# EAGLE board M248X (EAGLE 6.6.0)
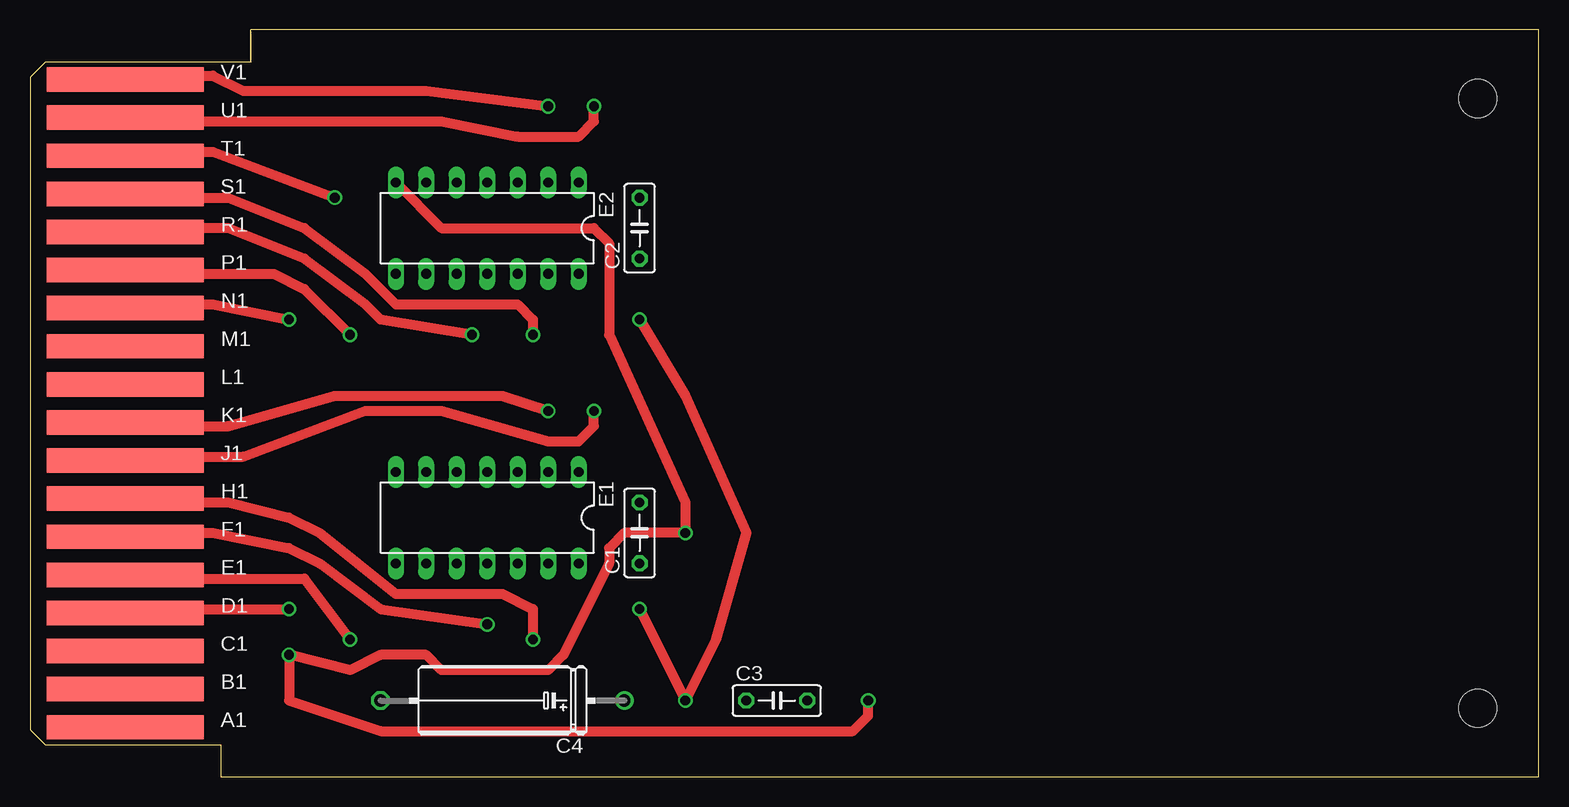
[diagram p0: board, top side]
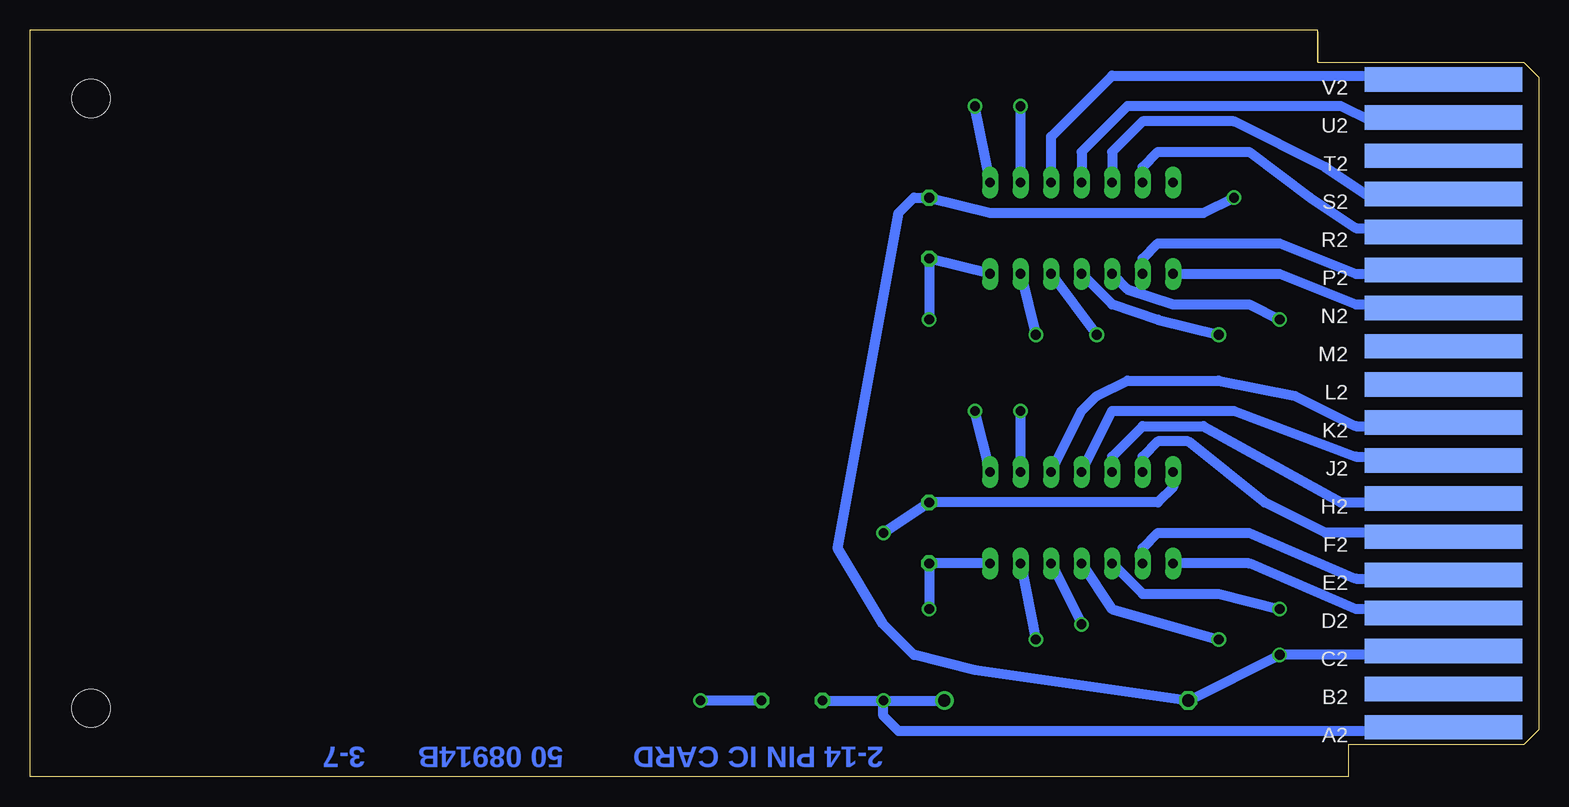
[diagram p1: board, bottom side, seen from below]

Size 125.73 x 62.23 mm. Coordinates in mm from the lower left corner, seen from the top.
Copper layers (1+16): Top 0.035mm / dielectric 1.5mm / Bottom 0.035mm
Design rules "16mils": minimum track width 16mil, minimum drill 32mil, track to track 15mil, track to pad 10mil, pad to pad 10mil, via to via 10mil, smd to smd 10mil, copper to edge 13mil, drill to drill 10mil, minimum pad ring 10mil, minimum via ring 8mil, stop-mask expansion 0mil, vias tented up to drill 0mil, thermal gap 10mil
Net classes: 0 default: width 0.813 mm

## Footprints (pad centres in the part's own frame; a part is rotated, then mirrored left to right if it is on the bottom)
C050-025X075 = drill 0.813 octagon: 1 -2.54,0; 2 2.54,0
E12-8 = drill 1.016: + -10.16,0 | drill 1.016 octagon: - 10.16,0
DIL14 = drill 0.813 long: 1 -7.62,-3.81; 2 -5.08,-3.81; 3 -2.54,-3.81; 4 0,-3.81; 5 2.54,-3.81; 6 5.08,-3.81; 7 7.62,-3.81; 8 7.62,3.81; 9 5.08,3.81; 10 2.54,3.81; 11 0,3.81; 12 -2.54,3.81; 13 -5.08,3.81; 14 -7.62,3.81
SINGLE = hole 3.175: 120.65,56.515; 120.65,5.715
EDGE-CON2 = smd 13.106 x 2.032: A1 7.938,4.128; B1 7.938,7.303; C1 7.938,10.477; D1 7.938,13.652; E1 7.938,16.828; F1 7.938,20.003; H1 7.938,23.177; J1 7.938,26.352; K1 7.938,29.527; L1 7.938,32.703; M1 7.938,35.877; N1 7.938,39.053; P1 7.938,42.227; R1 7.938,45.403; S1 7.938,48.578; T1 7.938,51.752; U1 7.938,54.928; V1 7.938,58.102 | smd 13.106 x 2.032 bottom: A2 7.938,4.128; B2 7.938,7.303; C2 7.938,10.477; D2 7.938,13.652; E2 7.938,16.828; F2 7.938,20.003; H2 7.938,23.177; J2 7.938,26.352; K2 7.938,29.527; L2 7.938,32.703; M2 7.938,35.877; N2 7.938,39.053; P2 7.938,42.227; R2 7.938,45.403; S2 7.938,48.578; T2 7.938,51.752; U2 7.938,54.928; V2 7.938,58.102

## Placement (x,y rotation side)
C1  .01uF  [C050-025X075]  50.8,20.32 90 top
C2  .01uF  [C050-025X075]  50.8,45.72 90 top
C3  .01uF  [C050-025X075]  62.23,6.35 0 top
C4  6.8uF  [E12-8]  39.37,6.35 180 top
E1  7495N  [DIL14]  38.1,21.59 180 top
E2  7495N  [DIL14]  38.1,45.72 180 top
U$1  OUTLINE-SINGLE  [SINGLE]  0,0 0 top
U$2  [EDGE-CON2]  0,0 0 top

## Library data of the parts
C1-C3 = rcl
C4 U$1 U$2 = dec-con
E1 E2 = 74xx-us

## Nets
GND: C1.2 C2.2 C3.2 C4.- E1.7 E2.7 U$2.C2 U$2.T1
N$1: E1.1 U$2.J1
N$2: E1.2 U$2.K1
N$3: E1.3 U$2.K2
N$4: E1.4 U$2.J2
N$5: E1.5 U$2.H2
N$6: E1.6 U$2.F2
N$7: E1.8 U$2.D2
N$8: E1.9 U$2.E2
N$9: E1.10 U$2.D1
N$10: E1.11 U$2.E1
N$11: E1.12 U$2.F1
N$12: E1.13 U$2.H1
N$13: E2.1 U$2.U1
N$14: E2.2 U$2.V1
N$15: E2.3 U$2.V2
N$16: E2.4 U$2.U2
N$17: E2.5 U$2.S2
N$18: E2.6 U$2.R2
N$19: E2.8 U$2.N2
N$20: E2.9 U$2.P2
N$21: E2.10 U$2.N1
N$22: E2.11 U$2.P1
N$23: E2.12 U$2.R1
N$24: E2.13 U$2.S1
VCC: C1.1 C2.1 C3.1 C4.+ E1.14 E2.14 U$2.A2

## Tracks (layer width: path | path; a pad name or v marks a point on that pad's centre or on a via)
GND  (via drill 0.81)
  Top 0.813: v69.85,6.35 69.85,5.08 68.58,3.81 29.21,3.81 21.59,6.35 v21.59,10.16 26.67,8.89 29.21,10.16 33.02,10.16 34.29,8.89 43.18,8.89 44.45,10.16 48.26,17.78 48.26,19.05 49.53,20.32 v54.61,20.32 54.61,22.86 48.26,36.83 48.26,44.45 46.99,45.72 34.29,45.72 E2.7 | U$2.T1 8.89,52.07 15.24,52.07 v25.4,48.26
  Bottom 0.813: v25.4,48.26 27.94,46.99 45.72,46.99 C2.2 52.07,48.26 53.34,46.99 58.42,19.05 54.61,12.7 52.07,10.16 46.99,8.89 C4.- v21.59,10.16 8.89,10.16 U$2.C2 | C3.2 v69.85,6.35 | v54.61,20.32 C1.2 31.75,22.86 30.48,24.13 E1.7
N$1  (via drill 0.81)
  Top 0.813: U$2.J1 10.16,26.67 17.78,26.67 27.94,30.48 34.29,30.48 43.18,27.94 45.72,27.94 46.99,29.21 v46.99,30.48
  Bottom 0.813: E1.1 v46.99,30.48
N$2  (via drill 0.81)
  Top 0.813: U$2.K1 8.89,29.21 16.51,29.21 25.4,31.75 39.37,31.75 v43.18,30.48
  Bottom 0.813: E1.2 v43.18,30.48
N$3
  Bottom 0.813: E1.3 38.1,30.48 36.83,31.75 34.29,33.02 26.67,33.02 20.32,31.75 15.24,29.21 8.89,29.21 U$2.K2
N$4
  Bottom 0.813: E1.4 35.56,30.48 25.4,30.48 15.24,26.67 8.89,26.67 U$2.J2
N$5
  Bottom 0.813: E1.5 35.56,26.67 33.02,29.21 27.94,29.21 16.51,22.86 8.89,22.86 U$2.H2
N$6
  Bottom 0.813: U$2.F2 8.89,20.32 17.78,20.32 22.86,22.86 29.21,27.94 31.75,27.94 33.02,26.67 E1.6
N$7
  Bottom 0.813: U$2.D2 10.16,13.97 15.24,13.97 24.13,17.78 E1.8
N$8
  Bottom 0.813: E1.9 33.02,19.05 31.75,20.32 24.13,20.32 15.24,16.51 8.89,16.51 U$2.E2
N$9  (via drill 0.81)
  Top 0.813: U$2.D1 10.16,13.97 v21.59,13.97
  Bottom 0.813: E1.10 33.02,15.24 26.67,15.24 v21.59,13.97
N$10  (via drill 0.81)
  Top 0.813: U$2.E1 8.89,16.51 22.86,16.51 v26.67,11.43
  Bottom 0.813: E1.11 35.56,13.97 v26.67,11.43
N$11  (via drill 0.81)
  Top 0.813: U$2.F1 8.89,20.32 15.24,20.32 21.59,19.05 24.13,17.78 29.21,13.97 v38.1,12.7
  Bottom 0.813: E1.12 v38.1,12.7
N$12  (via drill 0.81)
  Top 0.813: U$2.H1 8.89,22.86 16.51,22.86 21.59,21.59 24.13,20.32 30.48,15.24 39.37,15.24 41.91,13.97 v41.91,11.43
  Bottom 0.813: E1.13 v41.91,11.43
N$13  (via drill 0.81)
  Top 0.813: U$2.U1 7.62,54.61 34.29,54.61 40.64,53.34 45.72,53.34 46.99,54.61 v46.99,55.88
  Bottom 0.813: E2.1 v46.99,55.88
N$14  (via drill 0.81)
  Top 0.813: U$2.V1 8.89,58.42 15.24,58.42 17.78,57.15 33.02,57.15 v43.18,55.88
  Bottom 0.813: E2.2 v43.18,55.88
N$15
  Bottom 0.813: E2.3 40.64,53.34 35.56,58.42 8.89,58.42 U$2.V2
N$16
  Bottom 0.813: U$2.U2 10.16,54.61 13.97,54.61 16.51,55.88 34.29,55.88 38.1,52.07 E2.4
N$17
  Bottom 0.813: U$2.S2 10.16,48.26 13.97,48.26 17.78,50.8 25.4,54.61 33.02,54.61 35.56,52.07 E2.5
N$18
  Bottom 0.813: E2.6 33.02,50.8 31.75,52.07 24.13,52.07 19.05,48.26 15.24,45.72 8.89,45.72 U$2.R2
N$19
  Bottom 0.813: E2.8 21.59,41.91 15.24,39.37 8.89,39.37 U$2.N2
N$20
  Bottom 0.813: E2.9 33.02,43.18 31.75,44.45 21.59,44.45 15.24,41.91 8.89,41.91 U$2.P2
N$21  (via drill 0.81)
  Top 0.813: U$2.N1 8.89,39.37 15.24,39.37 v21.59,38.1
  Bottom 0.813: E2.10 34.29,40.64 30.48,39.37 24.13,39.37 v21.59,38.1
N$22  (via drill 0.81)
  Top 0.813: U$2.P1 8.89,41.91 20.32,41.91 22.86,40.64 v26.67,36.83
  Bottom 0.813: E2.11 35.56,39.37 31.75,38.1 v26.67,36.83
N$23  (via drill 0.81)
  Top 0.813: v36.83,36.83 29.21,38.1 27.94,39.37 22.86,43.18 16.51,45.72 8.89,45.72 U$2.R1
  Bottom 0.813: E2.12 v36.83,36.83
N$24  (via drill 0.81)
  Top 0.813: U$2.S1 8.89,48.26 16.51,48.26 22.86,45.72 27.94,41.91 30.48,39.37 40.64,39.37 41.91,38.1 v41.91,36.83
  Bottom 0.813: E2.13 v41.91,36.83
VCC  (via drill 0.81)
  Top 0.813: v50.8,13.97 v54.61,6.35 57.15,11.43 59.69,20.32 54.61,31.75 v50.8,38.1
  Bottom 0.813: E2.14 C2.1 v50.8,38.1 | C3.1 v54.61,6.35 | v54.61,6.35 C4.+ | U$2.A2 8.89,3.81 53.34,3.81 54.61,5.08 v54.61,6.35 | v50.8,13.97 C1.1 E1.14

## Text on the board
Bottom: 2-14 PIN IC CARD | 50 08914B | 3-7